# Altium PCB pcball.PcbDoc
Units mm, origin at the board's own origin, x right, y up, seen from the top; angles counter-clockwise.
Board outline 134.75 x 115.19 mm, 2 copper layers (Top Layer, Bottom Layer); 44 components, 105 nets, 540 pads, 8 vias.
Unrouted connection lines stored in the file: 1.
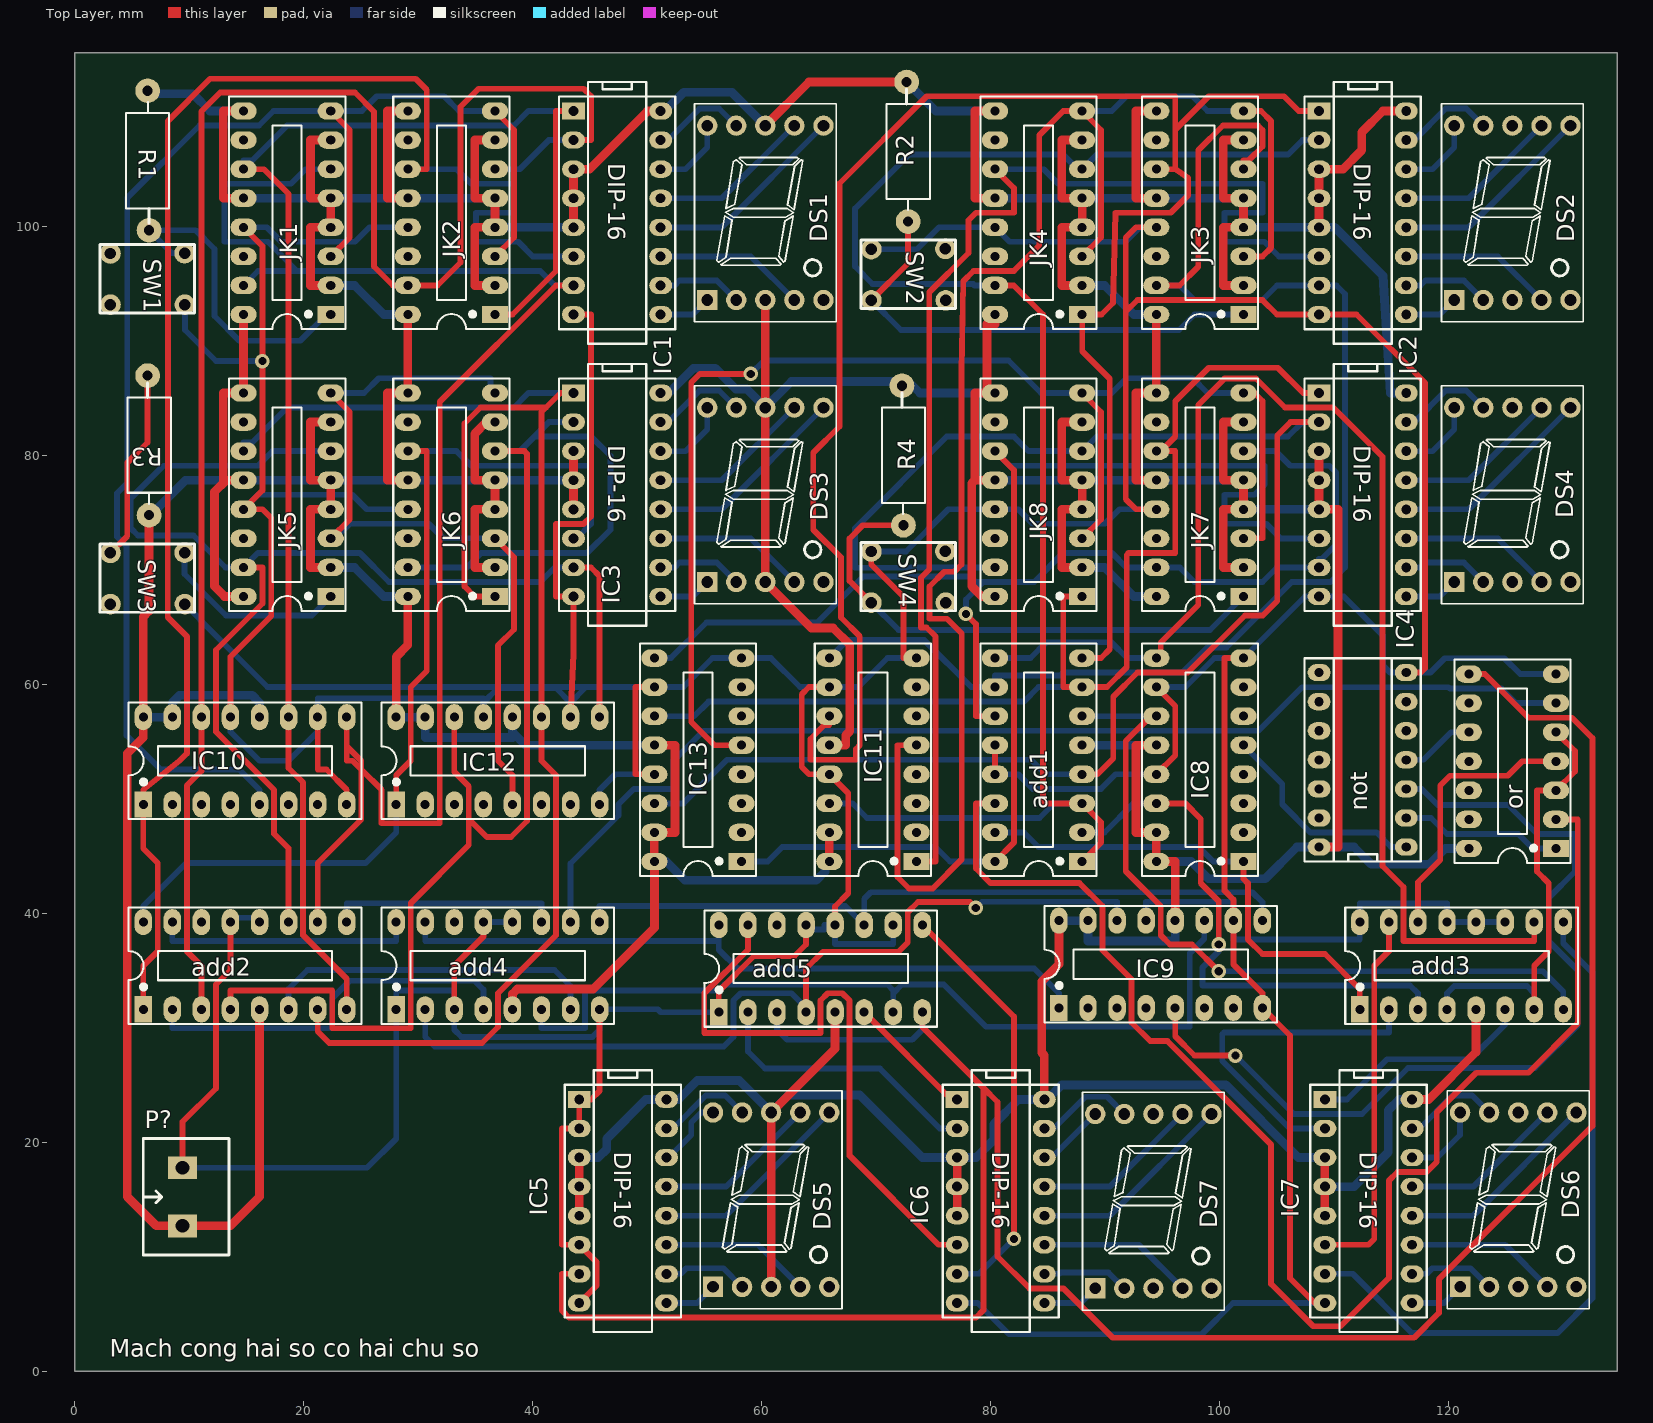
[diagram p0: Top Layer view]
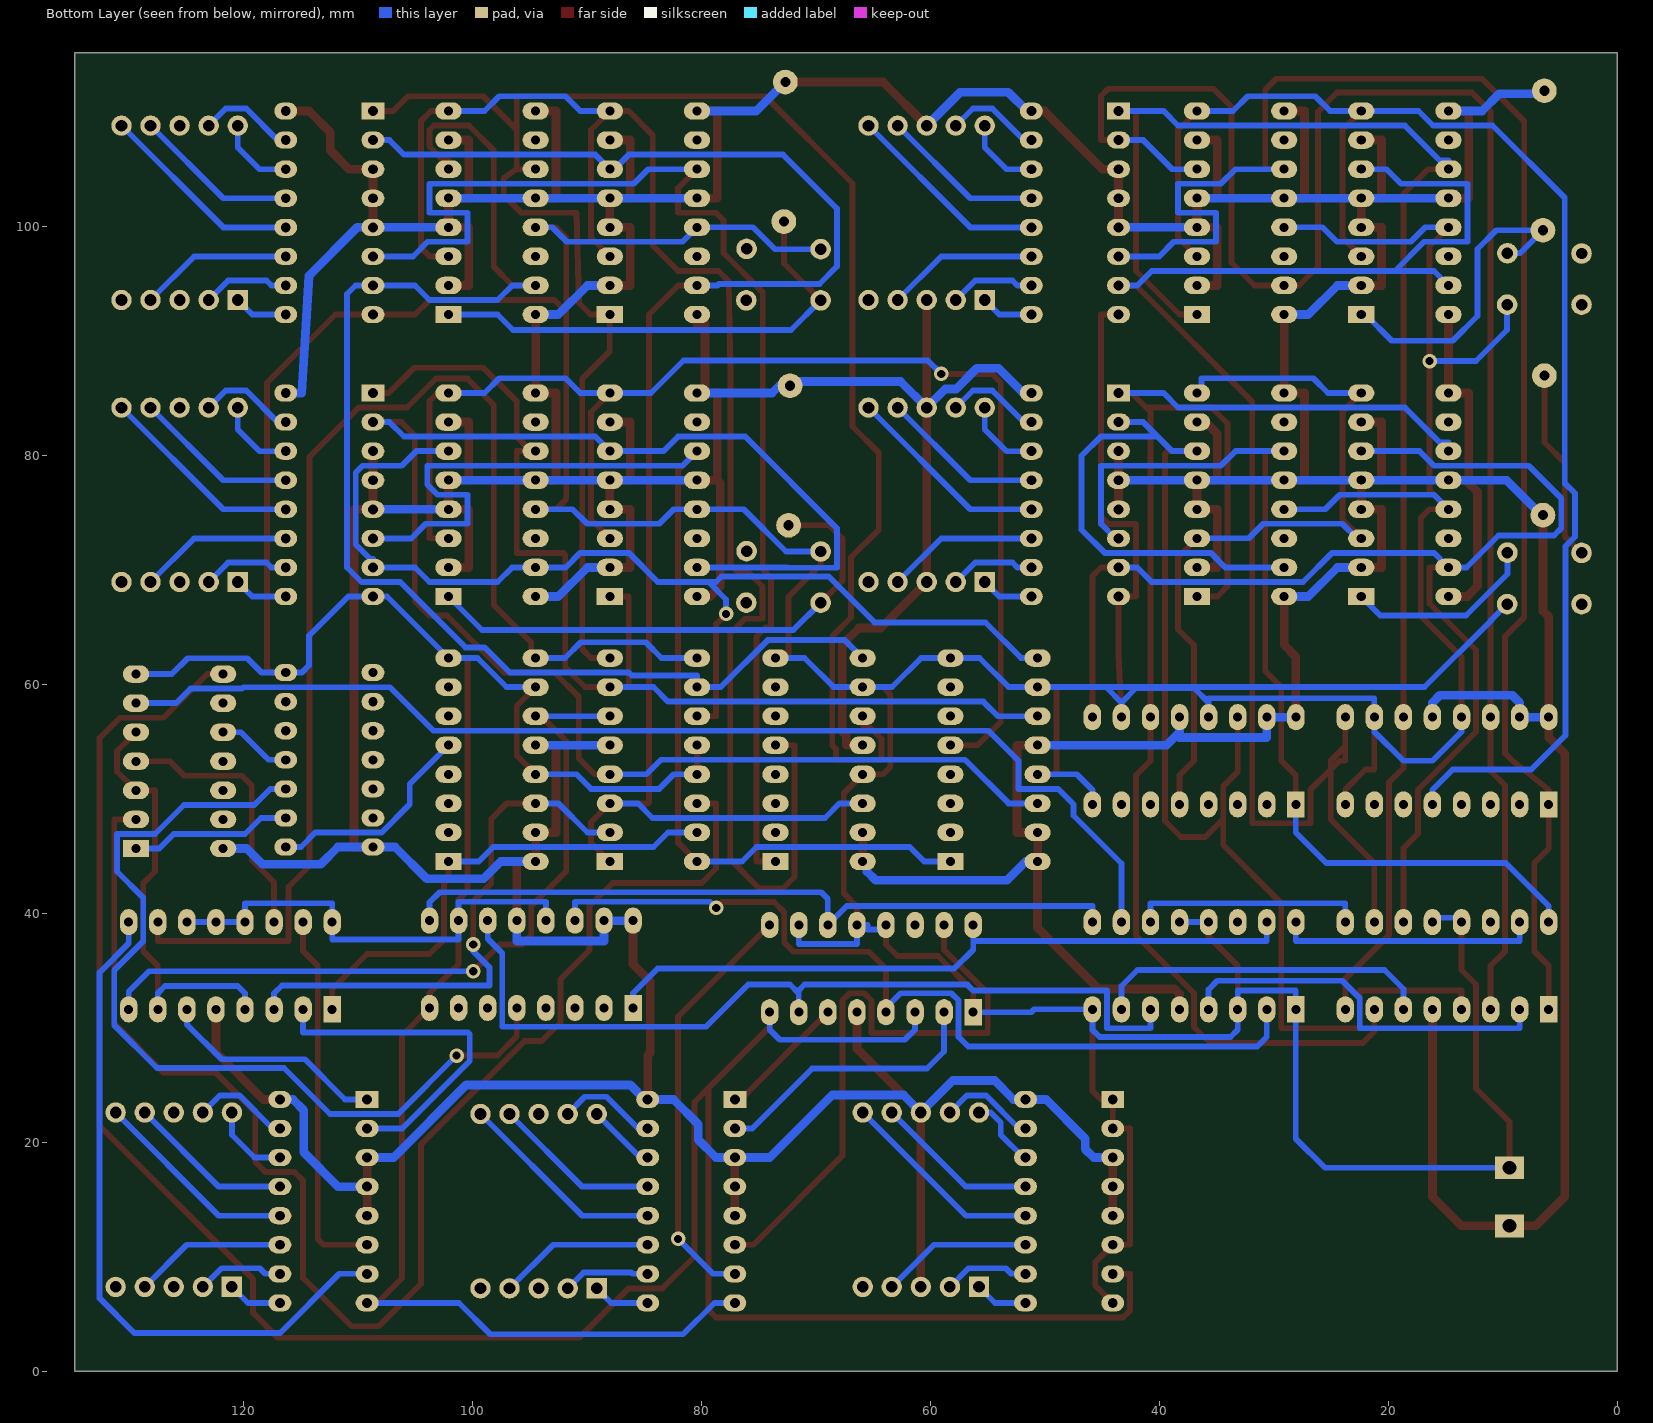
[diagram p1: Bottom Layer view, seen from below]
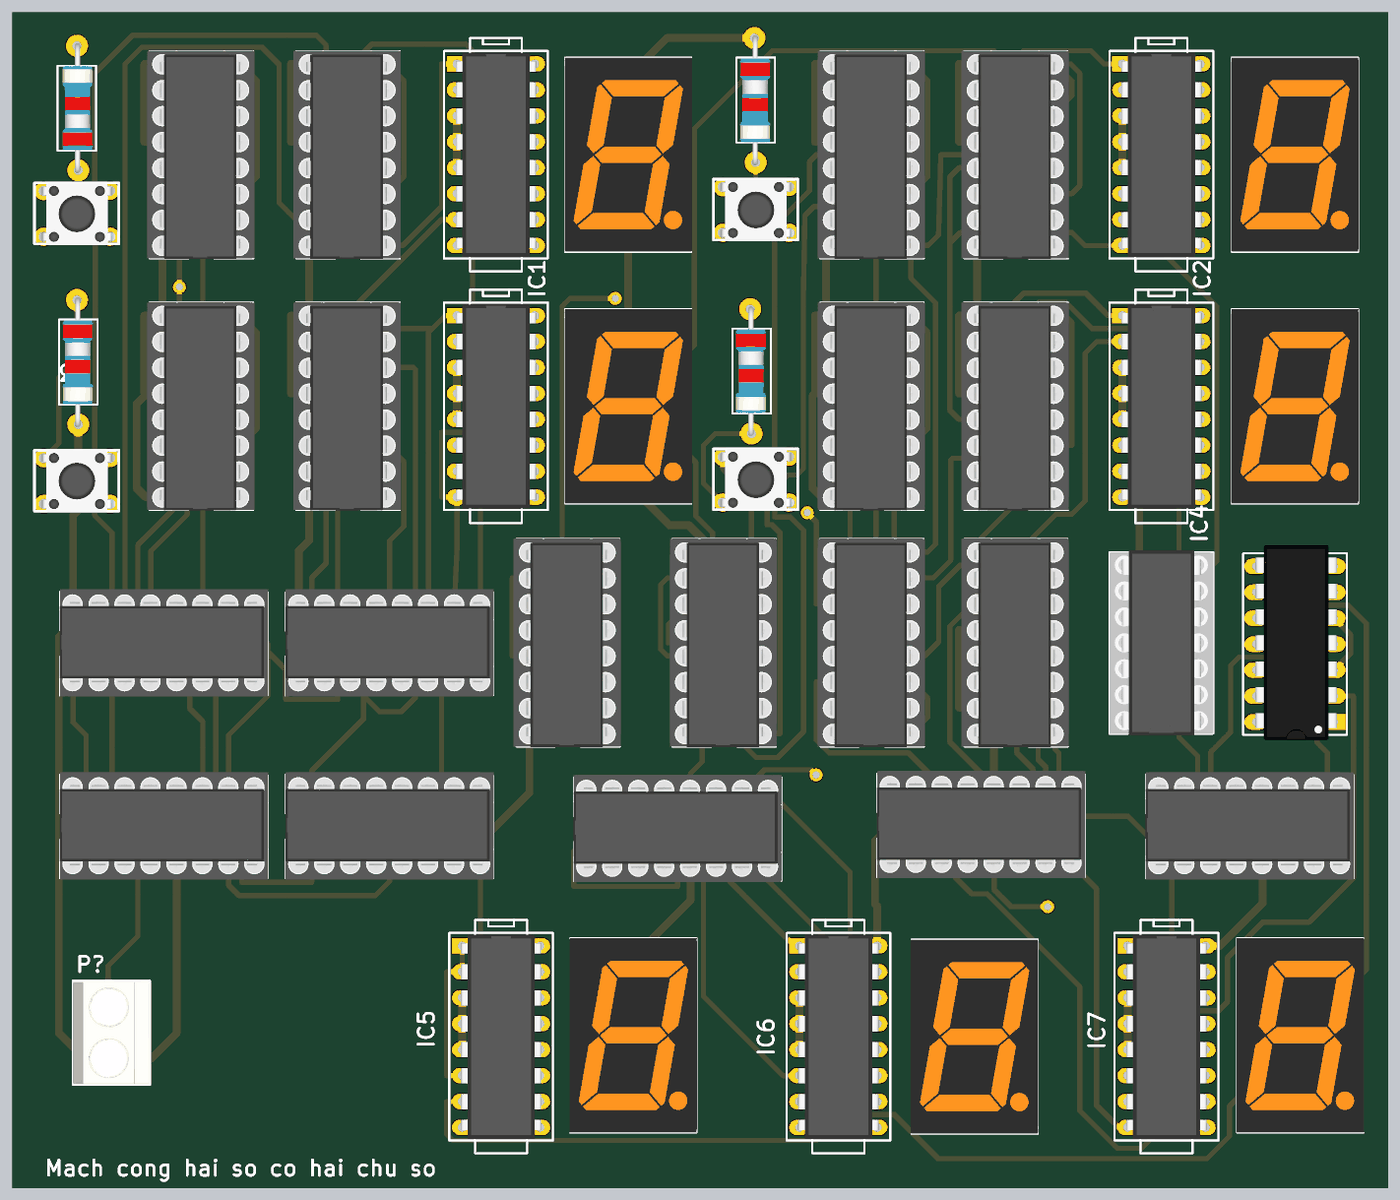
[diagram p2: 3D render of the assembled board from above, using the file's embedded part models]

## Layer stack, top to bottom
Top Solder: solder mask 0.0102, Solder Resist, Dk 3.5
Top Layer: signal copper 0.0356
Dielectric 1: dielectric 0.32, FR-4, Dk 4.8
Bottom Layer: signal copper 0.0356
Bottom Solder: solder mask 0.0102, Solder Resist, Dk 3.5

## Board outline
0,0 134.747,0 134.747,115.189 0,115.189

## Design rules (kind name [scope] priority, off if disabled: settings)
Clearance [All] p1: gap=0.254 ignorepadtopadclearanceinfootprint=FALSE except(0: Arc-Hole Track-Hole SMDPad-Hole THPad-Hole Via-Hole Fill-Hole Poly-Hole Region-Hole Text-Hole)
PolygonConnect [All] p1: connectstyle=Relief reliefconductorwidth=0.254 reliefentries=4 polygonreliefangle="90 Angle" airgapwidth=0.254
RoutingVias [All] p1: holewidth=0.711 width=1.27 viastyle="Through Hole" minholewidth=0.711 minwidth=1.27 maxholewidth=0.711 maxwidth=1.27
SolderMaskExpansion [All] p1: expansion=0.102
Width Width_1 [InNet('VCC')] p1: maxlimit=0.762 minlimit=0.762 preferedwidth=0.762
Width [All] p2: maxlimit=0.508 minlimit=0.508 preferedwidth=0.508
30 further rules are at their usual default settings.

## Components (designator, comment, footprint, x,y, rotation, side; value= is the part's Value field where it differs from the comment)
add1 "Component_1" DIP16/W0.3 88.011,44.537 r90 top
add2 "Component_1" DIP16/W0.3 5.969,31.623 r0 top
add3 "Component_1" DIP16/W0.3 112.268,31.623 r0 top
add4 "Component_1" DIP16/W0.3 28.067,31.623 r0 top
add5 "Component_1" DIP16/W0.3 56.261,31.369 r0 top
DS1 "7SEG" LED7SEG-1-0.56 60.198,100.584 r0 top
DS2 "7SEG" LED7SEG-1-0.56 125.476,100.584 r0 top
DS3 "7SEG" LED7SEG-1-0.56 60.198,75.946 r0 top
DS4 "7SEG" LED7SEG-1-0.56 125.476,75.946 r0 top
DS5 "7SEG" LED7SEG-1-0.56 60.706,14.351 r0 top
DS6 "7SEG" LED7SEG-1-0.56 125.984,14.351 r0 top
DS7 "7SEG" LED7SEG-1-0.56 94.107,14.224 r0 top
IC1 "74LS247" DIP16 47.371,101.212 r270 top value=74LS238
IC2 "74LS247" DIP16 112.522,101.212 r270 top value=74LS238
IC3 "74LS247" DIP16 47.371,76.574 r270 top value=74LS238
IC4 "74LS247" DIP16 112.522,76.574 r270 top value=74LS238
IC5 "74LS247" DIP16 47.879,14.852 r270 top value=74LS238
IC6 "74LS247" DIP16 80.899,14.852 r270 top value=74LS238
IC7 "74LS247" DIP16 113.03,14.852 r270 top value=74LS238
IC8 "7485" DIP16/W0.3 102.108,44.537 r90 top
IC9 "7485" DIP16/W0.3 85.979,31.75 r0 top
IC10 "7485" DIP16/W0.3 5.969,49.53 r0 top
IC11 "7485" DIP16/W0.3 73.533,44.537 r90 top
IC12 "7485" DIP16/W0.3 28.067,49.53 r0 top
IC13 "7485" DIP16/W0.3 58.249,44.537 r90 top
JK1 "74LS76" DIP16/W0.3 22.352,92.334 r90 top
JK2 "74LS76" DIP16/W0.3 36.703,92.334 r90 top
JK3 "74LS76" DIP16/W0.3 102.108,92.334 r90 top
JK4 "74LS76" DIP16/W0.3 88.011,92.334 r90 top
JK5 "74LS76" DIP16/W0.3 22.352,67.696 r90 top
JK6 "74LS76" DIP16/W0.3 36.703,67.696 r90 top
JK7 "74LS76" DIP16/W0.3 102.108,67.696 r90 top
JK8 "74LS76" DIP16/W0.3 88.011,67.696 r90 top
not "7404" DIP14_SOCKET 112.52,53.422 r90 top
or "7432" DIP14 129.413,45.675 r90 top
P? "Domino 2" "DOMINO 2- 5mm" 9.398,15.24 r90 top
R1 "Res" RES-1/2W 6.35,105.283 r90 top
R2 "Res" RES-1/2W 72.8,107.061 r270 top
R3 "Res" RES-1/2W 6.477,81.407 r270 top
R4 "Res" RES-1/2W 72.39,80.518 r270 top
SW1 "Nut Nhan 4 Chan" SW-4P-S 3.104,97.663 r0 top value="Nút Nh?n 4 Chân 6x6x9MM DIP"
SW2 "Nut Nhan 4 Chan" SW-4P-S 69.584,98.044 r0 top value="Nút Nh?n 4 Chân 6x6x9MM DIP"
SW3 "Nut Nhan 4 Chan" SW-4P-S 3.104,71.501 r0 top value="Nút Nh?n 4 Chân 6x6x9MM DIP"
SW4 "Nut Nhan 4 Chan" SW-4P-S 69.584,71.628 r0 top value="Nút Nh?n 4 Chân 6x6x9MM DIP"

## Footprints (in the part's own frame and the unit in brackets; to place one, negate y for a bottom-side part, rotate by r counter-clockwise, add the part's x,y. Pads: shape width x height; smd on the part's side, far side on the other; paste and mask are expansions set on the pad)
DIP14 [mil] "DIP, 14-Leads, Row Spacing 7.62mm, Pitch 2.54mm, Body 19.2x6.6mm"
  rect 60x90 hole 31: 1(0,0)
  oval 60x90 hole 31: 2(100,0) 3(200,0) 4(300,0) 5(400,0) 6(500,0) 7(600,0) 8(600,300) 9(500,300) 10(400,300) 11(300,300) 12(200,300) 13(100,300) 14(0,300)
  silkscreen extent -50,-50 650,350, body extent -70,-12 680,302, height 145
DIP14_SOCKET [mm]
  oval 1.5x2 hole 0.8: 1(-7.62,-3.81) 2(-5.08,-3.81) 3(-2.54,-3.81) 4(0,-3.81) 5(2.54,-3.81) 6(5.08,-3.81) 7(7.62,-3.81) 8(7.62,3.81) 9(5.08,3.81) 10(2.54,3.81) 11(0,3.81) 12(-2.54,3.81) 13(-5.08,3.81) 14(-7.62,3.81)
  silkscreen extent -8.89,-5.08 8.89,5.08, body extent -9.05,-5.08 9.05,5.08, height 8.5
DIP16 [mm]
  rect 1.5x2 hole 0.864: 1(-8.897,-3.812)
  oval 1.5x2 hole 0.864: 2(-6.357,-3.812) 3(-3.817,-3.812) 4(-1.277,-3.812) 5(1.263,-3.812) 6(3.803,-3.812) 7(6.343,-3.812) 8(8.883,-3.812) 9(8.883,3.808) 10(6.343,3.808) 11(3.803,3.808) 12(1.263,3.808) 13(-1.277,3.808) 14(-3.817,3.808) 15(-6.357,3.808) 16(-8.897,3.808)
  silkscreen extent -11.44,-5.08 11.42,5.08, body extent -10,-3.93 10,3.94, height 1.99
DIP16/W0.3 [mil]
  rect 60x90 hole 31: 1(0,0)
  oval 60x90 hole 31: 2(100,0) 3(200,0) 4(300,0) 5(400,0) 6(500,0) 7(600,0) 8(700,0) 9(700,300) 10(600,300) 11(500,300) 12(400,300) 13(300,300) 14(200,300) 15(100,300) 16(0,300)
  silkscreen extent -50,-50 750,350, body extent -52,-53 752,360, height 317
"DOMINO 2- 5mm" [mm]
  rect 2x2.5 hole 1.2: 1(-2.54,0) 2(2.54,0)
  silkscreen extent -5.08,-4.08 5.08,3.43, body extent -5,-4.07 5,3.43, height 10
LED7SEG-1-0.56 [mil]
  rect 70x70 hole 40: 1(-195,-275)
  round 70 hole 40: 2(-95,-275) 3(5,-275) 4(105,-275) 5(205,-275) 6(205,325) 7(105,325) 8(5,325) 9(-95,325) 10(-195,325)
  silkscreen extent -239,-350 249,400, body extent -241,-349 251,399, height 315
RES-1/2W [mil]
  round 85 hole 35: 1(-220,-5) 2(260,0)
  silkscreen extent -195,-74 221,75, body extent -230,-60 270,56, height 121
SW-4P-S [mm]
  round 1.8 hole 1: 1(0,0) 2(0,-4.47) 3(6.502,-4.47) 4(6.477,0.025)
  silkscreen extent -0.91,-5.18 7.34,0.79, body extent -0.86,-5.23 7.35,0.76, height 9.52

## Part data
DS1 DS2 DS3 DS4 DS5 DS6 DS7: library part LED7SEG-1, "14.2 mm General Purpose Blue 7-Segment Display: CC, RH DP, Gray Surface", Colour=Blue, PackageDocument=24-Sep-2002, ComponentLink1Description="Manufacturer Link", ComponentLink1URL=http://www.agilent.com/, DatasheetDocument=24-Sep-2002, LatestRevisionDate=17-Dec-2003, LatestRevisionNote="Schematic revised, PCB Footprint replaced.", MinimumIntensity="2020 ucd", Note="IF = 10 mA", PackageReference=H, Published=8-Jun-2000, Publisher="Altium Limited"
IC1 IC2 IC3 IC4 IC5 IC6 IC7: library part 74247, Copyright by=VanDungEvn@Gmail.com
IC8 IC9 IC10 IC11 IC12 IC13: "4-Bit Magnitude Comparator", Copyright by=VanDungEvn@Gmail.com
JK1 JK2 JK3 JK4 JK5 JK6 JK7 JK8: library part 7476, "Dual J-K Flip-Flop", Copyright by=VanDungEvn@Gmail.com
not: "Hex Inverter", Code_IPC=SOIC127P600-14, ComponentLink1Description="Manufacturer Link", ComponentLink1URL=http://www.national.com/, ComponentLink2Description=Datasheet, ComponentLink2URL=http://www.fairchildsemi.com/ds/74/74F04.pdf
or: "Quad 2-Input OR Gate"
P?: "Domino, 2-Pin", LatestRevisionDate=17-Jul-2002, LatestRevisionNote="Re-released for DXP Platform.", Publisher="Altium Limited"
R1 R2 R3 R4: Manufacturer="Generic Components", Class=Passive, Published=08/06/2000, Publisher="Altium Hobart Technology Centre", SubClass=R
SW1 SW2 SW3 SW4: "C?m", Don_Vi=Con, Ma_Hang=MH004077

## Via types
v1: diameter 1.27, hole 0.711, Top Layer to Bottom Layer, 8 vias

## Nets (pads, with @x,y where several pads share a name; then routed paths per layer and width w, separated by ;. In a path a pad name is that pad's centre, name@x,y a point inside that pad or via, vN(x,y) a via of type N, cw(c..) or ccw(c..) an arc to the next point about the centre after c; other vN are vias at no path point)
bit11: add2.10 IC1.7 IC10.9 JK1.6 JK1.15 | length 138.2
  Top Layer w0.508: add2.10 21.209,44.399 25.019,48.209 25.019,52.578 ; IC10.9 23.749,54.61 ; IC1.7 42.037,94.869 31.877,84.709 31.877,47.879 26.797,47.879 26.797,50.8 25.019,52.578 ; 23.749,54.61 25.019,53.34 25.019,52.578 ; 23.749,54.61 23.749,53.34 24.257,53.34 25.019,52.578
  Bottom Layer w0.508: JK1.15 16.002,96.144 19.406,96.144 ; JK1.6 20.142,105.034 18.872,103.764 13.081,103.764 13.081,98.684 16.866,98.684 19.406,96.144 ; IC1.7 41.931,94.869 40.656,96.144 19.406,96.144
bit12: add2.8 IC1.1 IC10.11 JK1.11 JK2.1 | length 132
  Top Layer w0.508: JK1.11 16.51,105.034 18.669,102.875 IC10.11 18.669,52.705 19.939,51.435 19.939,38.1 23.749,34.29 add2.8 ; JK2.1 38.232,92.334 42.037,96.139 42.037,110.109 IC1.1
  Bottom Layer w0.508: JK1.11 14.732,105.791 15.489,105.791 18.542,108.844 38.354,108.844 39.619,110.109 IC1.1
bit13: add2.3 IC1.2 IC10.14 JK2.6 JK2.15 | length 157.8
  Top Layer w0.508: add2.3 11.049,35.433 9.779,36.703 9.779,51.181 11.049,52.451 IC10.14 11.049,110.084 12.7,111.735 24.46,111.735 26.137,110.058 26.137,96.52 27.783,94.874 JK2.15 31.674,94.874 33.68,96.88 33.68,110.49 35.255,112.065 44.45,112.065 45.085,111.43 45.085,107.569 IC1.2
  Bottom Layer w0.508: JK2.6 38.862,105.034 41.397,107.569 IC1.2
bit14: add2.1 IC1.6 IC10.1 JK2.11 | length 141.5
  Top Layer w0.508: add2.1 5.969,35.433 7.239,36.703 7.239,44.399 5.969,45.669 IC10.1 5.969,50.8 9.144,53.34 9.779,53.975 9.779,64.211 8.103,65.888 8.103,76.721 8.128,76.746 8.128,98.361 8.103,98.387 8.103,109.22 11.811,112.928 29.769,112.928 30.734,111.963 30.734,105.034 JK2.11
  Bottom Layer w0.508: JK2.11 33.35,105.034 34.62,103.764 38.354,103.764 38.354,101.224 35.052,101.224 35.052,98.684 38.735,98.684 40.01,97.409 IC1.6
bit21: add1.10 IC2.7 IC11.9 JK3.6 JK3.15 | length 119.6
  Top Layer w0.508: JK3.15 96.52,94.874 98.146,96.499 98.146,106.68 100.309,108.844 103.378,108.844 103.759,108.463 103.759,107.01 102.565,105.816 102.108,105.816 JK3.6
  Bottom Layer w0.508: IC11.9 67.477,63.881 74.219,63.881 78.322,59.777 add1.10 80.391,60.782 86.095,60.782 86.36,61.047 96.749,61.047 98.947,63.246 100.609,63.246 106.324,68.961 109.704,68.961 110.98,70.237 110.98,94.125 110.236,94.869 IC2.7 105.024,94.869 103.759,93.604 97.815,93.604 96.545,94.874 JK3.15
bit22: add1.8 IC2.1 IC11.11 JK3.11 JK4.1 | length 170.5
  Top Layer w0.508: IC11.11 65.913,56.464 65.481,56.464 64.262,55.245 64.262,53.427 68.25,53.427 68.25,54.356 68.58,54.686 68.58,64.211 66.929,65.862 66.929,71.12 64.516,73.533 64.516,80.264 66.802,82.55 66.802,103.784 74.422,111.404 96.139,111.404 96.139,108.483 ; add1.8 89.662,62.317 90.424,63.079 90.424,86.716 88.011,89.129 JK4.1 89.692,92.334 90.703,93.345 90.932,101.224 95.758,101.224 97.282,102.748 97.282,104.272 96.139,105.034 ; JK3.11 96.139,105.034 ; IC2.1 106.934,110.109 105.639,111.404 99.06,111.404 96.139,108.483 ; 96.139,105.034 96.139,108.483
bit23: add1.1 add1.3 IC2.2 IC11.14 JK4.6 JK4.15 | length 143
  Top Layer w0.508: JK4.15 82.037,94.874 84.582,92.329 84.582,49.694 84.658,49.617 add1.3 89.662,47.966 89.662,46.188 add1.1
  Bottom Layer w0.508: IC11.14 67.945,49.617 69.215,48.347 84.277,48.347 85.547,49.617 add1.3 ; JK4.15 78.608,94.874 78.486,94.996 69.698,94.996 68.174,96.52 68.174,101.6 72.877,106.304 86.36,106.304 87.63,105.034 JK4.6 88.021,105.034 89.291,106.304 105.994,106.304 107.259,107.569 IC2.2
bit24: IC2.6 IC11.1 JK4.11 | length 110
  Top Layer w0.508: IC11.1 75.184,44.537 75.184,64.211 74.408,64.988 73.917,64.988 73.917,69.328 74.651,70.062 74.651,94.285 78.08,97.714 78.08,100.563 78.74,101.224 82.042,101.224 82.042,103.383 JK4.11
  Bottom Layer w0.508: JK4.11 84.658,105.034 85.928,103.764 103.759,103.764 103.759,101.224 100.457,101.224 100.457,98.684 103.932,98.684 105.207,97.409 IC2.6
bit31: add2.11 IC3.7 IC12.9 JK5.6 JK5.15 | length 115.9
  Top Layer w0.508: JK5.15 16.383,70.236 16.383,67.081 12.319,63.017 12.319,55.88 17.399,50.8 17.399,46.965 18.669,45.695 add2.11 ; IC3.7 45.085,70.231 45.847,69.469 IC12.9
  Bottom Layer w0.508: JK5.6 17.272,80.396 16.002,79.126 7.726,79.126 4.877,76.276 4.877,73.66 5.512,73.025 10.368,73.025 13.157,70.236 JK5.15 16.002,71.506 24.892,71.506 27.432,68.966 40.665,68.966 41.931,70.231 IC3.7
bit32: add2.7 IC3.1 IC12.11 JK5.11 JK6.1 | length 134.9
  Top Layer w0.508: add2.7 21.209,29.693 22.225,28.677 35.56,28.677 36.957,30.074 36.957,33.02 42.037,38.1 42.037,52.07 40.767,53.34 IC12.11 40.767,83.82 41.153,84.206 ; JK6.1 34.92,67.696 34.036,68.58 34.036,82.804 35.438,84.206 41.153,84.206 ; IC3.1 42.418,85.471 41.153,84.206
  Bottom Layer w0.508: JK5.11 14.732,81.153 15.489,81.153 18.542,84.206 38.354,84.206 39.619,85.471 IC3.1
bit33: add2.4 IC3.2 IC12.14 JK6.6 JK6.15 | length 132.6
  Top Layer w0.508: add2.4 13.589,33.274 22.479,33.274 22.479,29.972 29.337,29.972 29.337,40.894 34.417,45.974 34.417,48.26 ; IC12.14 33.147,52.375 34.417,51.105 34.417,48.26 ; JK6.6 39.268,80.396 39.497,80.167 39.497,48.082 38.1,46.685 35.992,46.685 34.417,48.26
  Bottom Layer w0.508: JK6.15 34.239,70.236 35.509,71.506 44.76,71.506 46.787,73.533 46.787,79.985 45.11,81.661 40.127,81.661 ; JK6.6 38.862,80.396 40.127,81.661 ; IC3.2 41.397,82.931 40.127,81.661
bit34: add2.16 IC3.6 IC12.1 JK6.11 | length 85.9
  Top Layer w0.508: IC12.1 28.067,52.07 29.337,53.34 29.337,59.792 30.734,61.189 30.734,80.396 JK6.11
  Bottom Layer w0.508: add2.16 5.969,40.64 9.728,44.399 25.4,44.399 28.067,47.066 IC12.1 ; JK6.11 33.35,80.396 34.62,79.126 45.08,79.126 45.085,79.121 45.085,74.041 43.815,72.771 IC3.6
bit41: add1.11 IC4.7 IC13.9 JK7.6 JK7.15 | length 96.1
  Top Layer w0.508: v1(77.851,66.167) 78.74,65.278 78.74,57.237 add1.11
  Bottom Layer w0.508: IC13.9 52.07,62.317 55.183,65.43 64.872,65.43 68.885,69.444 78.262,69.444 78.74,68.966 79.375,68.966 ; v1@77.851,66.269 77.851,67.442 79.375,68.966 ; JK7.6 104.927,80.396 106.202,79.121 109.626,79.121 110.218,78.529 110.218,72.245 108.966,70.993 108.71,70.993 IC4.7 105.024,70.231 103.759,68.966 97.815,68.966 96.545,70.236 JK7.15 91.872,70.236 90.602,71.506 86.36,71.506 83.82,68.966 79.375,68.966
bit42: add1.7 IC4.1 IC13.11 JK7.11 JK8.1 | length 98.5
  Top Layer w0.508: JK8.1 86.36,67.696 86.36,59.777 add1.7 90.17,59.777 91.897,61.505 91.897,71.328 92.075,71.506 96.139,71.506 96.139,80.396 JK7.11@94.874,80.396 ; JK7.11 JK7.11@94.874,80.396 ; IC4.1 107.32,85.471 105.11,87.681 99.06,87.681 96.139,84.76 96.139,81.661 JK7.11@94.874,80.396
  Bottom Layer w0.508: IC13.11 54.102,57.237 55.372,58.507 82.931,58.507 84.201,59.777 add1.7
bit43: add1.4 IC4.2 IC13.14 JK8.6 JK8.15 | length 145.7
  Top Layer w0.508: add1.4 89.343,52.157 90.729,53.543 90.729,58.939 92.837,61.047 97.242,61.047 102.235,66.04 103.784,66.04 105.054,67.31 105.054,81.763 106.223,82.931 IC4.2
  Bottom Layer w0.508: IC13.14 53.162,49.617 56.972,53.427 83.541,53.427 84.811,52.157 add1.4 ; JK8.15 72.498,70.236 72.468,70.206 68.174,70.206 68.174,73.66 76.179,81.666 82.042,81.666 83.312,80.396 JK8.6 89.281,81.666 105.994,81.666 107.259,82.931 IC4.2
bit44: add1.16 IC4.6 IC13.1 JK8.11 | length 101.4
  Top Layer w0.508: add1.16 82.042,46.188 82.042,78.745 JK8.11
  Bottom Layer w0.508: IC13.1 60.528,44.537 61.798,45.807 75.184,45.807 76.454,44.537 add1.16 ; JK8.11 81.661,79.126 103.962,79.126 103.962,77.47 103.078,76.586 100.457,76.586 100.457,74.046 104.089,74.046 105.364,72.771 IC4.6
button1: JK1.1 R1.1 SW1.4 | length 28.2
  Bottom Layer w0.508: SW1.4 8.484,97.688 R1.1 10.546,99.695 12.192,98.049 12.192,92.202 14.351,90.043 19.68,90.043 21.971,92.334 JK1.1
button2: JK3.1 R2.2 SW2.2 | length 42.4
  Top Layer w0.508: SW2.2 72.8,96.79 R2.2
  Bottom Layer w0.508: SW2.2 72.175,90.983 96.464,90.983 97.815,92.334 JK3.1
button3: JK5.1 R3.1 SW3.4 | length 33.7
  Top Layer w0.508: 3.104,71.501 4.572,72.969 4.572,79.375 6.35,81.153 R3.1
  Bottom Layer w0.508: SW3.4 9.581,69.667 13.208,66.04 20.696,66.04 JK5.1
button4: JK7.1 R4.2 SW4.2 | length 46.3
  Top Layer w0.508: SW4.2 67.691,69.051 67.691,72.771 68.834,73.914 R4.2
  Bottom Layer w0.508: SW4.2 71.972,64.77 99.182,64.77 JK7.1
c1: add2.9 add4.11 | length 20.3
  Bottom Layer w0.508: add2.9 23.749,40.894 40.767,40.894 add4.11
c2: add2.6 add4.7 | length 29.7
  Bottom Layer w0.508: add2.6 18.669,33.401 20.32,35.052 41.91,35.052 43.307,33.655 add4.7
c3: add2.2 add4.4 | length 34.1
  Bottom Layer w0.508: add2.2 8.509,29.972 22.479,29.972 22.479,32.588 24.003,34.112 34.925,34.112 35.687,33.35 add4.4
c4: add2.15 add4.16 | length 22.9
  Bottom Layer w0.508: add2.15 8.509,37.592 28.067,37.592 add4.16
du_phan_chuc: add2.14
dv1: add1.9 add3.10 IC8.9 | length 115.1
  Top Layer w0.508: IC8.9 94.869,62.317 94.869,63.678 98.146,66.954 98.146,84.434 100.457,86.746 103.195,86.746 105.74,84.201 109.957,84.201 114.249,79.908 114.249,44.145 116.078,42.316 116.078,37.592 127.508,37.592 add3.10
  Bottom Layer w0.508: add1.9 83.49,62.317 84.876,63.703 90.551,63.703 91.937,62.317 IC8.9
dv2: add1.6 add3.8 IC8.11 | length 67
  Top Layer w0.508: IC8.11 93.991,57.237 91.821,55.067 91.821,43.688 94.869,40.64 94.869,38.1 95.682,37.287 97.612,37.287 v1(99.949,34.95)
  Bottom Layer w0.508: add1.6 IC8.11 ; v1(99.949,34.95) 128.27,34.95 130.048,33.172 add3.8
dv3: add1.2 add3.3 IC8.14 | length 48.3
  Top Layer w0.508: IC8.14 97.017,49.617 98.374,48.26 98.374,42.647 99.949,41.072 v1(99.949,37.287)
  Bottom Layer w0.508: add1.2 89.967,47.077 92.507,49.617 IC8.14 ; v1(99.949,37.287) 99.949,36.702 98.536,35.289 98.536,33.706 116.662,33.706 117.348,33.02 add3.3
dv4: add1.15 add3.1 IC8.1 | length 43.1
  Top Layer w0.508: IC8.1 102.108,43.028 102.489,42.647 102.489,37.719 103.759,36.449 109.22,36.449 112.268,33.401 add3.1
  Bottom Layer w0.508: add1.15 82.931,47.077 84.201,45.807 98.196,45.807 99.466,44.537 IC8.1
GND: add1.12 add1.13 add2.12 add2.13 add3.11 add3.12 add3.13 add3.16 add4.1 add4.3 add4.8 add4.12 add4.13 add5.1 add5.10 add5.12 add5.13 IC1.8 IC2.8 IC3.8 IC4.8 IC5.1 IC5.2 IC5.6 IC5.8 IC6.8 IC7.8 IC8.8 IC8.10 IC8.13 IC9.8 IC9.10 IC9.13 IC10.8 IC10.10 IC10.13 IC11.8 IC11.10 IC11.13 IC12.8 IC12.10 IC12.13 IC13.8 IC13.10 IC13.13 JK1.13 JK2.13 JK3.13 JK4.13 JK5.13 JK6.13 JK7.13 JK8.13 not.7 or.7 P?.2 SW1.3 SW2.1 SW3.3 SW4.1 | length 813.4
  Top Layer w0.508: P?.2 9.398,21.793 12.319,24.714 12.319,33.782 13.589,35.052 add2.13 ; IC10.13 13.589,62.433 17.145,65.989 17.145,74.554 16.383,75.316 JK5.13 16.383,76.967 v1(16.383,88.265) 16.383,98.303 JK1.13 ; IC10.10 21.209,52.578 21.971,52.578 23.749,50.8 IC10.8 ; add4.3 33.147,35.433 35.687,37.973 add4.13 ; IC12.10 43.559,62.66 IC3.8 42.037,67.691 42.037,74.041 44.45,74.041 45.085,74.676 45.085,92.329 IC1.8 ; IC5.8 45.593,7.495 45.593,9.523 IC5.6 42.545,11.049 42.545,21.209 IC5.2 IC5.1 45.085,23.749 45.847,24.511 add4.8 ; IC13.13 48.971,52.157 48.971,59.777 IC13.10 ; add5.1 56.261,33.198 59.334,36.271 62.865,36.271 63.881,37.287 add5.13 ; IC11.10 64.135,59.777 63.5,59.142 63.5,52.792 64.135,52.157 IC11.13 67.564,50.506 67.564,41.758 66.421,40.615 add5.12 ; SW4.1 69.584,70.485 72.39,67.679 72.39,62.317 IC11.8 ; add1.13 add1.12 ; IC8.13 96.139,53.808 96.139,58.126 IC8.10 ; JK7.13 92.705,75.316 91.821,76.2 91.821,92.588 ; JK3.13 92.71,99.954 91.821,99.065 91.821,92.588 ; IC8.8 100.457,62.317 100.457,41.986 101.219,41.224 IC9.10 101.219,35.56 103.759,33.02 IC9.8 106.172,29.337 106.172,8.128 108.331,5.969 IC7.8 ; not.7 117.577,61.042 117.958,61.423 117.958,86.36 111.989,92.329 IC2.8 105.029,92.329 103.754,93.604 92.837,93.604 91.821,92.588
  Bottom Layer w0.508: P?.2 25.527,17.78 28.067,20.32 add4.1 28.067,33.274 33.147,33.274 add4.3 33.147,29.845 33.782,29.21 45.212,29.21 45.847,29.845 add4.8 50.927,31.623 51.181,31.369 add5.1 ; SW3.3@9.606,67.229 SW3.3 11.014,65.623 10.973,65.623 16.818,59.777 44.664,59.777 ; SW1.3 9.606,90.978 12.319,88.265 v1(16.383,88.265) ; add2.13 13.589,39.624 16.129,39.624 add2.12 ; IC10.13 13.589,55.88 16.129,53.34 18.669,53.34 21.209,55.88 IC10.10 21.209,58.801 35.687,58.801 35.687,58.42 ; JK5.13 16.002,76.586 24.232,76.586 25.502,75.316 JK6.13 ; JK1.13 16.764,99.954 18.034,98.684 24.46,98.684 25.73,99.954 JK2.13 ; add4.13 add4.12 ; IC12.13 35.687,58.42 ; IC12.10 43.307,58.42 ; IC12.8 45.847,50.8 47.204,52.157 IC13.13 ; add5.13 64.262,38.608 65.468,38.608 65.468,38.989 add5.12 66.421,37.338 71.501,37.338 add5.10 ; SW4.1 72.619,71.628 76.306,75.316 JK8.13 82.423,75.316 83.693,74.046 89.992,74.046 91.262,75.316 JK7.13 ; SW2.1 73.584,98.044 75.494,99.954 JK4.13 81.661,98.684 91.77,98.684 93.04,99.954 JK3.13 ; IC11.8 70.993,62.317 68.453,59.777 IC11.10 63.348,59.777 60.808,62.317 IC13.8 55.702,62.317 53.162,59.777 IC13.10 44.664,59.777 ; IC6.8 78.867,5.969 81.61,3.226 98.45,3.226 101.194,5.969 IC7.8 ; add1.13 82.423,52.157 83.693,50.887 89.662,50.887 90.932,52.157 IC8.13 ; IC9.13 93.599,41.021 101.219,41.021 IC9.10 101.219,37.719 112.268,37.719 add3.16 112.268,40.894 119.888,40.894 add3.13 add3.12 add3.11 ; IC8.10 97.028,59.777 99.568,62.317 IC8.8 107.482,67.691 IC4.8 110.871,67.691 114.3,64.262 114.3,61.677 114.935,61.042 not.7 118.421,61.042 119.685,62.306 124.898,62.306 126.289,60.915 or.7 ; 35.687,58.42 36.957,59.69 42.037,59.69 43.307,58.42 ; 43.307,58.42 44.664,59.777
kqc1: add4.9 add5.11 IC9.9 | length 64.5
  Bottom Layer w0.508: add4.9 45.847,40.64 67.31,40.64 add5.11 68.961,41.275 69.545,41.859 102.87,41.859 103.759,40.97 IC9.9
kqc2: add4.6 add5.7 IC9.11 | length 75.6
  Bottom Layer w0.508: add4.6 40.767,29.972 44.577,29.972 44.577,33.274 56.261,33.274 56.769,33.782 70.993,33.782 71.501,33.274 71.501,33.02 ; add5.7 71.501,33.02 ; IC9.11 98.679,37.795 97.409,36.525 97.409,30.099 79.604,30.099 75.921,33.782 72.263,33.782 71.501,33.02
kqc3: add4.2 add5.4 IC9.14 | length 77.8
  Top Layer w0.508: add5.4 63.881,35.179 65.354,36.652 71.958,36.652 72.771,37.465 72.771,40.107 73.66,40.996 78.207,40.996 v1(78.715,40.488)
  Bottom Layer w0.508: add4.2 30.607,29.21 31.445,28.372 56.693,28.372 57.531,29.21 57.531,32.385 58.166,33.02 62.611,33.02 63.881,31.75 add5.4 ; v1(78.715,40.488) 79.248,41.021 91.059,41.021 IC9.14
kqc4: add4.15 add5.16 IC9.1 | length 62
  Bottom Layer w0.508: add4.15 30.607,37.592 56.261,37.592 ; add5.16 56.261,37.592 ; IC9.1 85.979,33.02 83.82,35.179 57.912,35.179 56.261,36.83 56.261,37.592
Netadd3_4: add3.4 add3.7 or.3 or.5 | length 39.3
  Top Layer w0.508: add3.7 127.508,35.433 128.778,36.703 128.778,42.647 127.762,43.663 127.762,50.755 or.3 131.064,52.406 131.064,54.184 129.794,55.454 129.794,55.835 or.5
  Bottom Layer w0.508: add3.4 119.888,33.02 120.523,33.655 126.873,33.655 127.508,33.02 add3.7
NetDS1_1: DS1.1 IC1.9 | length 4.6
  Bottom Layer w0.508: IC1.9 53.975,92.329 DS1.1
NetDS1_2: DS1.2 IC1.10 | length 7.5
  Bottom Layer w0.508: IC1.10 52.4,94.869 52.832,95.301 56.083,95.301 DS1.2
NetDS1_4: DS1.4 IC1.11 | length 13.3
  Bottom Layer w0.508: IC1.11 59.055,97.409 DS1.4
NetDS1_6: DS1.6 IC1.12 | length 17.9
  Bottom Layer w0.508: IC1.12 56.515,99.949 DS1.6
NetDS1_7: DS1.7 IC1.13 | length 14.3
  Bottom Layer w0.508: IC1.13 56.515,102.489 DS1.7
NetDS1_9: DS1.9 IC1.15 | length 8.4
  Bottom Layer w0.508: IC1.15 51.816,107.569 54.585,110.338 56.286,110.338 DS1.9
NetDS1_10: DS1.10 IC1.14 | length 6.8
  Bottom Layer w0.508: IC1.14 53.34,105.029 55.245,106.934 DS1.10
NetDS2_1: DS2.1 IC2.9 | length 4.7
  Bottom Layer w0.508: IC2.9 119.253,92.329 DS2.1
NetDS2_2: DS2.2 IC2.10 | length 7.6
  Bottom Layer w0.508: IC2.10 117.577,94.869 118.008,95.301 121.361,95.301 DS2.2
NetDS2_4: DS2.4 IC2.11 | length 13.4
  Bottom Layer w0.508: IC2.11 124.333,97.409 DS2.4
NetDS2_6: DS2.6 IC2.12 | length 18
  Bottom Layer w0.508: IC2.12 121.793,99.949 DS2.6
NetDS2_7: DS2.7 IC2.13 | length 14.4
  Bottom Layer w0.508: IC2.13 121.793,102.489 DS2.7
NetDS2_9: DS2.9 IC2.15 | length 8.5
  Bottom Layer w0.508: IC2.15 117.018,107.569 119.786,110.338 121.564,110.338 DS2.9
NetDS2_10: DS2.10 IC2.14 | length 6.9
  Bottom Layer w0.508: IC2.14 118.618,105.029 120.523,106.934 DS2.10
NetDS3_1: DS3.1 IC3.9 | length 4.6
  Bottom Layer w0.508: IC3.9 53.975,67.691 DS3.1
NetDS3_2: DS3.2 IC3.10 | length 7.5
  Bottom Layer w0.508: IC3.10 52.4,70.231 52.832,70.663 56.083,70.663 DS3.2
NetDS3_4: DS3.4 IC3.11 | length 13.3
  Bottom Layer w0.508: IC3.11 59.055,72.771 DS3.4
NetDS3_6: DS3.6 IC3.12 | length 17.9
  Bottom Layer w0.508: IC3.12 56.515,75.311 DS3.6
NetDS3_7: DS3.7 IC3.13 | length 14.3
  Bottom Layer w0.508: IC3.13 56.515,77.851 DS3.7
NetDS3_9: DS3.9 IC3.15 | length 8.4
  Bottom Layer w0.508: IC3.15 51.816,82.931 54.585,85.7 56.286,85.7 DS3.9
NetDS3_10: DS3.10 IC3.14 | length 6.8
  Bottom Layer w0.508: IC3.14 53.34,80.391 55.245,82.296 DS3.10
NetDS4_1: DS4.1 IC4.9 | length 4.7
  Bottom Layer w0.508: IC4.9 119.253,67.691 DS4.1
NetDS4_2: DS4.2 IC4.10 | length 7.6
  Bottom Layer w0.508: IC4.10 117.577,70.231 118.008,70.663 121.361,70.663 DS4.2
NetDS4_4: DS4.4 IC4.11 | length 13.4
  Bottom Layer w0.508: IC4.11 124.333,72.771 DS4.4
NetDS4_6: DS4.6 IC4.12 | length 18
  Bottom Layer w0.508: IC4.12 121.793,75.311 DS4.6
NetDS4_7: DS4.7 IC4.13 | length 14.4
  Bottom Layer w0.508: IC4.13 121.793,77.851 DS4.7
NetDS4_9: DS4.9 IC4.15 | length 8.5
  Bottom Layer w0.508: IC4.15 117.018,82.931 119.786,85.7 121.564,85.7 DS4.9
NetDS4_10: DS4.10 IC4.14 | length 6.9
  Bottom Layer w0.508: IC4.14 118.618,80.391 120.523,82.296 DS4.10
NetDS5_1: DS5.1 IC5.9 | length 4.6
  Bottom Layer w0.508: IC5.9 54.356,5.969 DS5.1
NetDS5_2: DS5.2 IC5.10 | length 7.5
  Bottom Layer w0.508: IC5.10 52.934,8.509 53.416,8.992 56.667,8.992 DS5.2
NetDS5_4: DS5.4 IC5.11 | length 13.2
  Bottom Layer w0.508: IC5.11 59.69,11.049 DS5.4
NetDS5_6: DS5.6 IC5.12 | length 18
  Bottom Layer w0.508: IC5.12 56.896,13.589 DS5.6
NetDS5_7: DS5.7 IC5.13 | length 14.4
  Bottom Layer w0.508: IC5.13 56.896,16.129 DS5.7
NetDS5_9: DS5.9 IC5.15 | length 8.4
  Bottom Layer w0.508: IC5.15 52.248,21.209 55.143,24.105 56.794,24.105 DS5.9
NetDS5_10: DS5.10 IC5.14 | length 6.3
  Bottom Layer w0.508: IC5.14 51.867,18.669 53.845,20.647 53.845,21.729 54.722,22.606 DS5.10
NetDS6_1: DS6.1 IC7.9 | length 4.8
  Bottom Layer w0.508: IC7.9 119.634,5.969 DS6.1
NetDS6_2: DS6.2 IC7.10 | length 7.6
  Bottom Layer w0.508: IC7.10 118.11,8.509 118.593,8.992 121.945,8.992 DS6.2
NetDS6_4: DS6.4 IC7.11 | length 13.3
  Bottom Layer w0.508: IC7.11 124.968,11.049 DS6.4
NetDS6_6: DS6.6 IC7.12 | length 18.1
  Bottom Layer w0.508: IC7.12 122.174,13.589 DS6.6
NetDS6_7: DS6.7 IC7.13 | length 14.5
  Bottom Layer w0.508: IC7.13 122.174,16.129 DS6.7
NetDS6_9: DS6.9 IC7.15 | length 8.6
  Bottom Layer w0.508: IC7.15 117.475,21.209 120.371,24.105 122.072,24.105 DS6.9
NetDS6_10: DS6.10 IC7.14 | length 7
  Bottom Layer w0.508: IC7.14 119.05,18.669 121.031,20.65 DS6.10
NetDS7_1: DS7.1 IC6.9 | length 5
  Bottom Layer w0.508: IC6.9 87.884,5.969 DS7.1
NetDS7_2: DS7.2 IC6.10 | length 7.6
  Bottom Layer w0.508: IC6.10 86.004,8.509 86.131,8.636 90.297,8.636 DS7.2
NetDS7_4: DS7.4 IC6.11 | length 13.6
  Bottom Layer w0.508: IC6.11 92.964,11.049 DS7.4
NetDS7_6: DS7.6 IC6.12 | length 18.3
  Bottom Layer w0.508: IC6.12 90.424,13.589 DS7.6
NetDS7_7: DS7.7 IC6.13 | length 14.7
  Bottom Layer w0.508: IC6.13 90.424,16.129 DS7.7
NetDS7_9: DS7.9 IC6.15 | length 8.8
  Bottom Layer w0.508: IC6.15 85.522,21.209 88.29,23.978 90.195,23.978 DS7.9
NetDS7_10: DS7.10 IC6.14 | length 6
  Bottom Layer w0.508: IC6.14 85.344,18.669 DS7.10
NetIC8_5: IC8.5 not.1 | length 19
  Bottom Layer w0.508: IC8.5 105.486,51.319 105.486,49.53 107.95,47.066 113.741,47.066 115.005,45.802 not.1
NetIC9_5: IC9.5 not.3 | length 78.8
  Top Layer w0.508: IC9.5 96.139,29.261 97.815,27.584 v1(101.397,27.584)
  Bottom Layer w0.508: v1(101.397,27.584) 106.502,22.479 112.457,22.479 116.47,26.492 127.584,26.492 131.318,30.226 131.318,35.027 128.778,37.567 128.778,41.377 131.064,43.663 131.064,46.945 127.762,46.945 125.222,49.485 119.075,49.485 117.678,50.882 not.3
Netnot_2: not.2 or.1 | length 14.2
  Bottom Layer w0.508: not.2 118.491,48.342 119.888,46.945 126.111,46.945 127.381,45.675 or.1
Netnot_4: not.4 or.10 | length 6.5
  Bottom Layer w0.508: not.4 117.831,53.422 120.244,55.835 or.10
out11: add3.9 IC7.7 | length 60.7
  Bottom Layer w0.508: IC7.7 111.658,8.509 116.84,3.327 129.54,3.327 132.588,6.375 132.588,34.849 130.048,37.389 add3.9
out12: add3.6 IC7.1 | length 19.8
  Bottom Layer w0.508: IC7.1 111.15,23.749 114.656,27.254 121.92,27.254 124.968,30.302 add3.6
out13: add3.2 IC7.2 | length 30.4
  Bottom Layer w0.508: IC7.2 106.147,21.209 100.254,27.102 100.254,29.439 100.406,29.591 114.808,29.591 add3.2
out14: add3.15 IC7.6 | length 32.7
  Top Layer w0.508: IC7.6 113.03,11.049 113.538,11.557 113.538,35.433 114.808,36.703 add3.15
out21: add5.9 IC6.7 | length 37
  Top Layer w0.508: add5.9 82.042,30.988 v1(82.042,11.557)
  Bottom Layer w0.508: IC6.7 78.994,8.509 v1(82.042,11.557)
out22: add5.6 IC6.1 | length 10.8
  Top Layer w0.508: add5.6 IC6.1@76.581,23.749
out23: add5.2 IC6.2 | length 24.5
  Bottom Layer w0.508: add5.2 58.801,27.94 60.3,26.441 70.333,26.441 75.565,21.209 IC6.2
out24: add5.15 IC6.6 | length 53.2
  Top Layer w0.508: add5.15 58.801,36.83 54.991,33.02 54.991,29.566 65.151,29.566 65.151,32.385 65.786,33.02 67.056,33.02 67.691,32.385 67.691,18.821 75.463,11.049 IC6.6
out31: add5.3 add5.8 IC5.7 or.8 | length 213.3
  Top Layer w0.508: IC5.7 42.545,8.509 42.545,5.334 43.18,4.699 78.74,4.699 79.375,5.334 79.375,24.765 ; add5.8 74.041,30.099 79.375,24.765 ; or.8 123.19,60.915 127,57.105 130.81,57.105 132.588,55.327 132.588,21.438 119.177,8.026 119.177,5.08 117.018,2.921 90.678,2.921 86.36,7.239 83.414,7.239 80.62,10.033 80.62,23.52 79.375,24.765
  Bottom Layer w0.508: add5.3 61.341,29.845 62.23,28.956 73.152,28.956 74.041,29.845 add5.8
outOr1: add4.10 or.6 | length 100.2
  Bottom Layer w0.508: add4.10 43.307,44.374 47.498,48.565 47.498,49.53 48.855,50.887 52.299,50.887 52.299,53.34 54.926,55.967 103.415,55.967 107.213,59.766 120.021,59.766 120.142,59.645 124.638,59.645 125.908,58.375 or.6
phan_du_dv: add1.14 or.2 | length 126.3
  Top Layer w0.508: add1.14 78.74,49.617 78.74,43.917 80.01,42.647 87.782,42.647 89.789,40.64 89.789,36.779 92.329,34.239 92.329,30.48 93.955,28.854 95.453,28.854 104.521,19.787 104.521,7.62 108.204,3.937 110.592,3.937 114.808,8.153 114.808,16.637 115.57,17.399 118.11,17.399 118.999,18.288 118.999,22.631 122.453,26.086 127,26.086 131.318,30.404 131.318,48.215 or.2
phan_nho: add3.14 or.4 | length 23.7
  Top Layer w0.508: add3.14 117.348,42.723 119.305,44.68 119.305,51.188 120.142,52.025 125.197,52.025 126.467,53.295 or.4
rs1: IC10.5 JK1.3 JK1.8 JK2.3 JK2.8 | length 127
  Top Layer w0.508: JK1.3 24.003,99.065 24.003,108.463 JK1.8 ; JK2.3 38.354,99.065 38.354,108.463 JK2.8
  Bottom Layer w0.508: IC10.5 16.129,50.8 14.351,52.578 7.493,52.578 4.512,55.559 4.512,72.084 3.683,72.913 3.683,76.708 4.572,77.597 4.572,102.54 10.876,108.844 16.078,108.844 17.348,110.114 JK1.8 25.07,110.114 26.36,111.404 32.258,111.404 33.549,110.114 JK2.8
rs2: IC11.5 JK3.3 JK3.8 JK4.3 JK4.8 | length 142.5
  Top Layer w0.508: IC11.5 71.882,54.697 71.882,43.18 72.873,42.189 74.955,42.189 77.495,44.729 77.495,64.454 76.2,65.75 74.679,65.75 74.679,68.566 75.963,69.85 76.834,69.85 77.469,70.485 77.469,87.324 77.622,95.25 78.516,96.144 82.042,96.144 84.252,98.354 84.252,108.006 86.36,110.114 JK4.8 89.662,108.463 89.662,99.065 JK4.3 ; JK3.3 103.759,97.414 104.521,98.176 104.521,109.22 103.627,110.114 JK3.8
  Bottom Layer w0.508: JK4.8 90.602,110.114 91.892,111.404 97.663,111.404 98.954,110.114 JK3.8
rs3: IC12.5 JK5.3 JK5.8 JK6.3 JK6.8 | length 70.7
  Top Layer w0.508: JK5.3 24.003,74.427 24.003,83.825 JK5.8 ; JK6.3 38.354,71.125 38.354,64.821 36.957,63.424 36.957,53.34 38.227,52.07 IC12.5
  Bottom Layer w0.508: JK5.3 22.733,72.776 24.003,74.046 30.912,74.046 32.182,72.776 JK6.3 ; JK5.8 25.248,85.476 26.538,86.766 36.322,86.766 36.322,85.476 JK6.8
rs4: IC13.5 JK7.3 JK7.8 JK8.3 JK8.8 | length 115.9
  Top Layer w0.508: IC13.5 55.88,54.697 53.848,56.729 53.848,86.385 54.61,87.147 v1(59.055,87.147) ; JK8.3 89.662,74.427 89.662,83.825 JK8.8 ; JK7.3 103.759,72.776 103.759,84.784 103.067,85.476 JK7.8
  Bottom Layer w0.508: v1(59.055,87.147) 60.223,88.316 81.564,88.316 84.404,85.476 JK8.8 90.602,85.476 91.892,86.766 97.663,86.766 98.954,85.476 JK7.8
VCC: add1.5 add2.5 add3.5 add4.5 add5.5 DS1.3 DS1.8 DS3.3 DS3.8 DS5.3 DS5.8 IC1.3 IC1.4 IC1.5 IC1.16 IC2.3 IC2.4 IC2.5 IC2.16 IC3.3 IC3.4 IC3.5 IC3.16 IC4.3 IC4.4 IC4.5 IC4.16 IC5.3 IC5.4 IC5.5 IC5.16 IC6.3 IC6.4 IC6.5 IC6.16 IC7.3 IC7.4 IC7.5 IC7.16 IC8.12 IC8.15 IC8.16 IC9.12 IC9.15 IC9.16 IC10.12 IC10.15 IC10.16 IC11.12 IC11.15 IC11.16 IC12.12 IC12.15 IC12.16 IC13.12 IC13.15 IC13.16 JK1.2 JK1.4 JK1.5 JK1.7 JK1.9 JK1.12 JK1.16 JK2.2 JK2.4 JK2.5 JK2.7 JK2.9 JK2.12 JK2.16 JK3.2 JK3.4 JK3.5 JK3.7 JK3.9 JK3.12 JK3.16 JK4.2 JK4.4 JK4.5 JK4.7 JK4.9 JK4.12 JK4.16 JK5.2 JK5.4 JK5.5 JK5.7 JK5.9 JK5.12 JK5.16 JK6.2 JK6.4 JK6.5 JK6.7 JK6.9 JK6.12 JK6.16 JK7.2 JK7.4 JK7.5 JK7.7 JK7.9 JK7.12 JK7.16 JK8.2 JK8.4 JK8.5 JK8.7 JK8.9 JK8.12 JK8.16 not.14 or.14 P?.1 R1.2 R2.1 R3.2 R4.1 | length 1095.2
  Top Layer w0.762: R3.2@6.477,74.676 6.477,66.421 5.969,65.913 IC10.16 5.969,55.372 4.572,53.975 4.572,15.24 7.112,12.7 P?.1 13.589,12.7 16.129,15.24 add2.5 ; JK5.16 13.076,67.696 12.192,68.58 12.192,76.835 13.213,77.856 ; JK5.12 13.213,77.856 ; JK1.16 JK5.9 12.954,85.476 12.954,77.856 13.213,77.856 ; JK1.12 12.954,102.494 12.954,110.114 JK1.9 ; JK5.2 20.574,70.236 20.574,75.316 JK5.4 JK5.5 20.574,77.856 20.574,82.936 JK5.7 ; JK1.2 20.574,94.874 20.574,99.954 JK1.4 JK1.5 20.574,102.494 20.574,107.574 JK1.7 ; IC12.16 28.067,62.433 29.083,63.449 JK6.16 ; JK6.12 27.305,77.856 27.305,85.476 JK6.9 JK2.16 ; JK2.12 27.305,102.494 27.305,110.114 JK2.9 ; JK6.2 34.925,70.236 34.925,75.316 JK6.4 JK6.5 34.925,77.856 34.925,81.915 35.946,82.936 JK6.7 ; JK2.2 34.925,94.874 34.925,99.954 JK2.4 JK2.5 34.925,102.494 34.925,107.574 JK2.7 ; add4.5 38.227,32.969 38.659,33.401 45.288,33.401 50.648,38.76 50.648,44.537 IC13.16 IC13.15@50.629,47.066 ; IC3.5 IC3.4 IC3.3 ; IC1.5 IC1.4 IC1.3 44.958,105.029 50.038,110.109 IC1.16 ; IC5.5 IC5.4 IC5.3 ; IC13.15 IC13.15@50.629,47.066 ; IC13.12 52.426,54.697 52.426,47.066 IC13.15@50.629,47.066 ; DS1.3 DS3.8 DS3.3 64.338,64.948 66.243,64.948 67.691,63.5 67.691,55.917 67.354,55.58 67.354,54.697 IC11.12 ; DS1.8 64.135,112.649 R2.1 ; DS5.3 DS5.8 66.421,28.194 add5.5 ; IC11.16 IC11.15 ; IC6.5 IC6.4 IC6.3 ; JK8.16 79.242,67.696 78.358,68.58 78.358,77.601 78.613,77.856 ; JK8.12 78.613,77.856 ; JK8.9 JK8.9@79.692,85.476 ; JK4.16 80.391,91.506 79.692,91.506 JK8.9@79.692,85.476 ; JK4.12 78.613,102.494 78.613,110.114 JK4.9 ; IC6.16 84.707,27.612 84.48,27.838 84.48,34.061 85.979,35.56 IC9.16 ; JK8.2 86.233,70.236 86.233,75.316 JK8.4 JK8.5 86.233,77.856 86.233,82.936 JK8.7 ; JK4.2 86.233,94.874 86.233,99.954 JK4.4 JK4.5 86.233,102.494 86.233,107.574 JK4.7 ; IC8.12 92.71,54.697 92.71,47.077 IC8.15 IC8.16 96.139,44.537 IC9.12 ; JK7.12 92.71,77.856 92.71,85.476 JK7.9 JK3.16 ; JK3.12 92.71,102.494 92.71,110.114 JK3.9 ; JK7.2 100.33,70.236 100.33,75.316 JK7.4 JK7.5 100.33,77.856 100.33,82.936 JK7.7 ; JK3.2 100.33,94.874 100.33,99.954 JK3.4 JK3.5 100.33,102.494 100.33,107.574 JK3.7 ; not.14 110.363,45.802 110.363,75.311 IC4.5 IC4.4 IC4.3 ; IC2.5 IC2.4 IC2.3 110.795,105.029 112.446,106.68 112.446,108.255 114.3,110.109 IC2.16 ; IC7.5 IC7.4 IC7.3 ; IC7.16 118.288,23.749 122.428,27.889 add3.5 ; 78.613,77.856 78.613,85.476 JK8.9@79.692,85.476
  Bottom Layer w0.762: IC10.16 IC10.15 8.509,58.42 9.144,59.055 15.494,59.055 16.129,58.42 IC10.12 ; R1.2 6.604,111.633 10.287,111.633 11.806,110.114 JK1.9 ; R3.2@6.477,74.676 9.657,77.856 JK5.12 JK5.5 JK6.12 JK6.5 40.107,77.856 40.111,77.851 IC3.4 ; JK1.12 JK1.5 JK2.12 JK2.5 ; JK5.2 24.435,70.236 26.975,67.696 JK6.16 ; JK1.2 24.435,94.874 26.975,92.334 JK2.16 ; IC12.16 IC12.15 30.607,55.372 38.227,55.372 38.227,55.84 ; JK2.4 40.107,99.954 40.111,99.949 IC1.5 ; IC12.12 38.227,55.84 ; IC5.3 45.72,18.669 46.457,19.406 46.457,20.32 49.886,23.749 IC5.16 52.73,23.749 54.381,25.4 58.039,25.4 DS5.8 62.357,24.13 68.58,24.13 74.041,18.669 IC6.3 78.74,18.669 80.289,20.218 80.289,21.59 82.448,23.749 IC6.16 84.963,23.749 86.233,25.019 100.548,25.019 106.898,18.669 IC7.3 ; IC13.16 51.664,44.537 53.3,42.901 64.77,42.901 65.532,43.663 65.532,44.537 IC11.16 ; IC13.12 39.37,54.697 38.227,55.84 ; IC3.16 51.892,85.471 54.051,87.63 55.94,87.63 57.745,85.825 58.701,85.825 DS3.8 62.611,86.487 72.831,86.487 73.842,85.476 JK8.9 ; IC1.16 51.537,110.109 53.188,111.76 57.404,111.76 DS1.8 ; R2.1 75.209,110.114 JK4.9 ; JK8.12 JK8.5 JK7.12 JK7.5 ; JK4.12 JK4.5 JK3.12 JK3.5 ; IC9.16 IC9.15 88.519,37.592 96.139,37.592 IC9.12 ; add1.5 IC8.12 ; JK8.2 89.967,70.236 92.507,67.696 JK7.16 ; JK4.2 89.967,94.874 92.507,92.334 JK3.16 ; IC8.16 97.536,44.537 99.046,43.028 104.013,43.028 106.788,45.802 not.14 111.76,45.802 113.265,44.298 118.364,44.298 119.742,45.675 or.14 ; JK7.4 105.385,75.316 105.389,75.311 IC4.5 ; JK3.4 105.385,99.954 105.389,99.949 IC2.5 110.084,99.949 114.3,95.733 114.935,85.471 IC4.16 ; IC7.4 111.76,16.129 114.757,19.126 114.757,22.809 115.697,23.749 IC7.16
pads on no net: add4.14 add5.14 DS1.5 DS2.3 DS2.5 DS2.8 DS3.5 DS4.3 DS4.5 DS4.8 DS5.5 DS6.3 DS6.5 DS6.8 DS7.3 DS7.5 DS7.8 IC8.2 IC8.3 IC8.4 IC8.6 IC8.7 IC9.2 IC9.3 IC9.4 IC9.6 IC9.7 IC10.2 IC10.3 IC10.4 IC10.6 IC10.7 IC11.2 IC11.3 IC11.4 IC11.6 IC11.7 IC12.2 IC12.3 IC12.4 IC12.6 IC12.7 IC13.2 IC13.3 IC13.4 IC13.6 IC13.7 JK1.10 JK1.14 JK2.10 JK2.14 JK3.10 JK3.14 JK4.10 JK4.14 JK5.10 JK5.14 JK6.10 JK6.14 JK7.10 JK7.14 JK8.10 JK8.14 not.5 not.6 not.8 not.9 not.10 not.11 not.12 not.13 or.9 or.11 or.12 or.13 SW1.1 SW1.2 SW2.3 SW2.4 SW3.1 SW3.2 SW4.3 SW4.4

## Keep-outs
Top Layer:
  region: 3.81,2.159

## Silkscreen, mask and mechanical layers (free items; w line width, h text height)
Top Overlay:
  text "Mach cong hai so co hai chu so" at 3.048,1.27 h1.52

## Text inside footprints (layer, text, board x,y; h text height)
IC1: Top Overlay "DIP-16" at 46.607,105.537 h1.5 r270
IC2: Top Overlay "DIP-16" at 111.758,105.537 h1.5 r270
IC3: Top Overlay "DIP-16" at 46.607,80.899 h1.5 r270
IC4: Top Overlay "DIP-16" at 111.758,80.899 h1.5 r270
IC5: Top Overlay "DIP-16" at 47.115,19.177 h1.5 r270
IC6: Top Overlay "DIP-16" at 80.135,19.177 h1.5 r270
IC7: Top Overlay "DIP-16" at 112.266,19.177 h1.5 r270